# Altium PCB backplaneIGVC.PcbDoc
Units mm, origin at the board's own origin, x right, y up, seen from the top; angles counter-clockwise.
Board outline 105.5 x 102.5 mm, 2 copper layers (Top Layer, Bottom Layer); 21 components, 14 nets, 70 pads, 0 vias.
Unrouted connection lines stored in the file: 1.
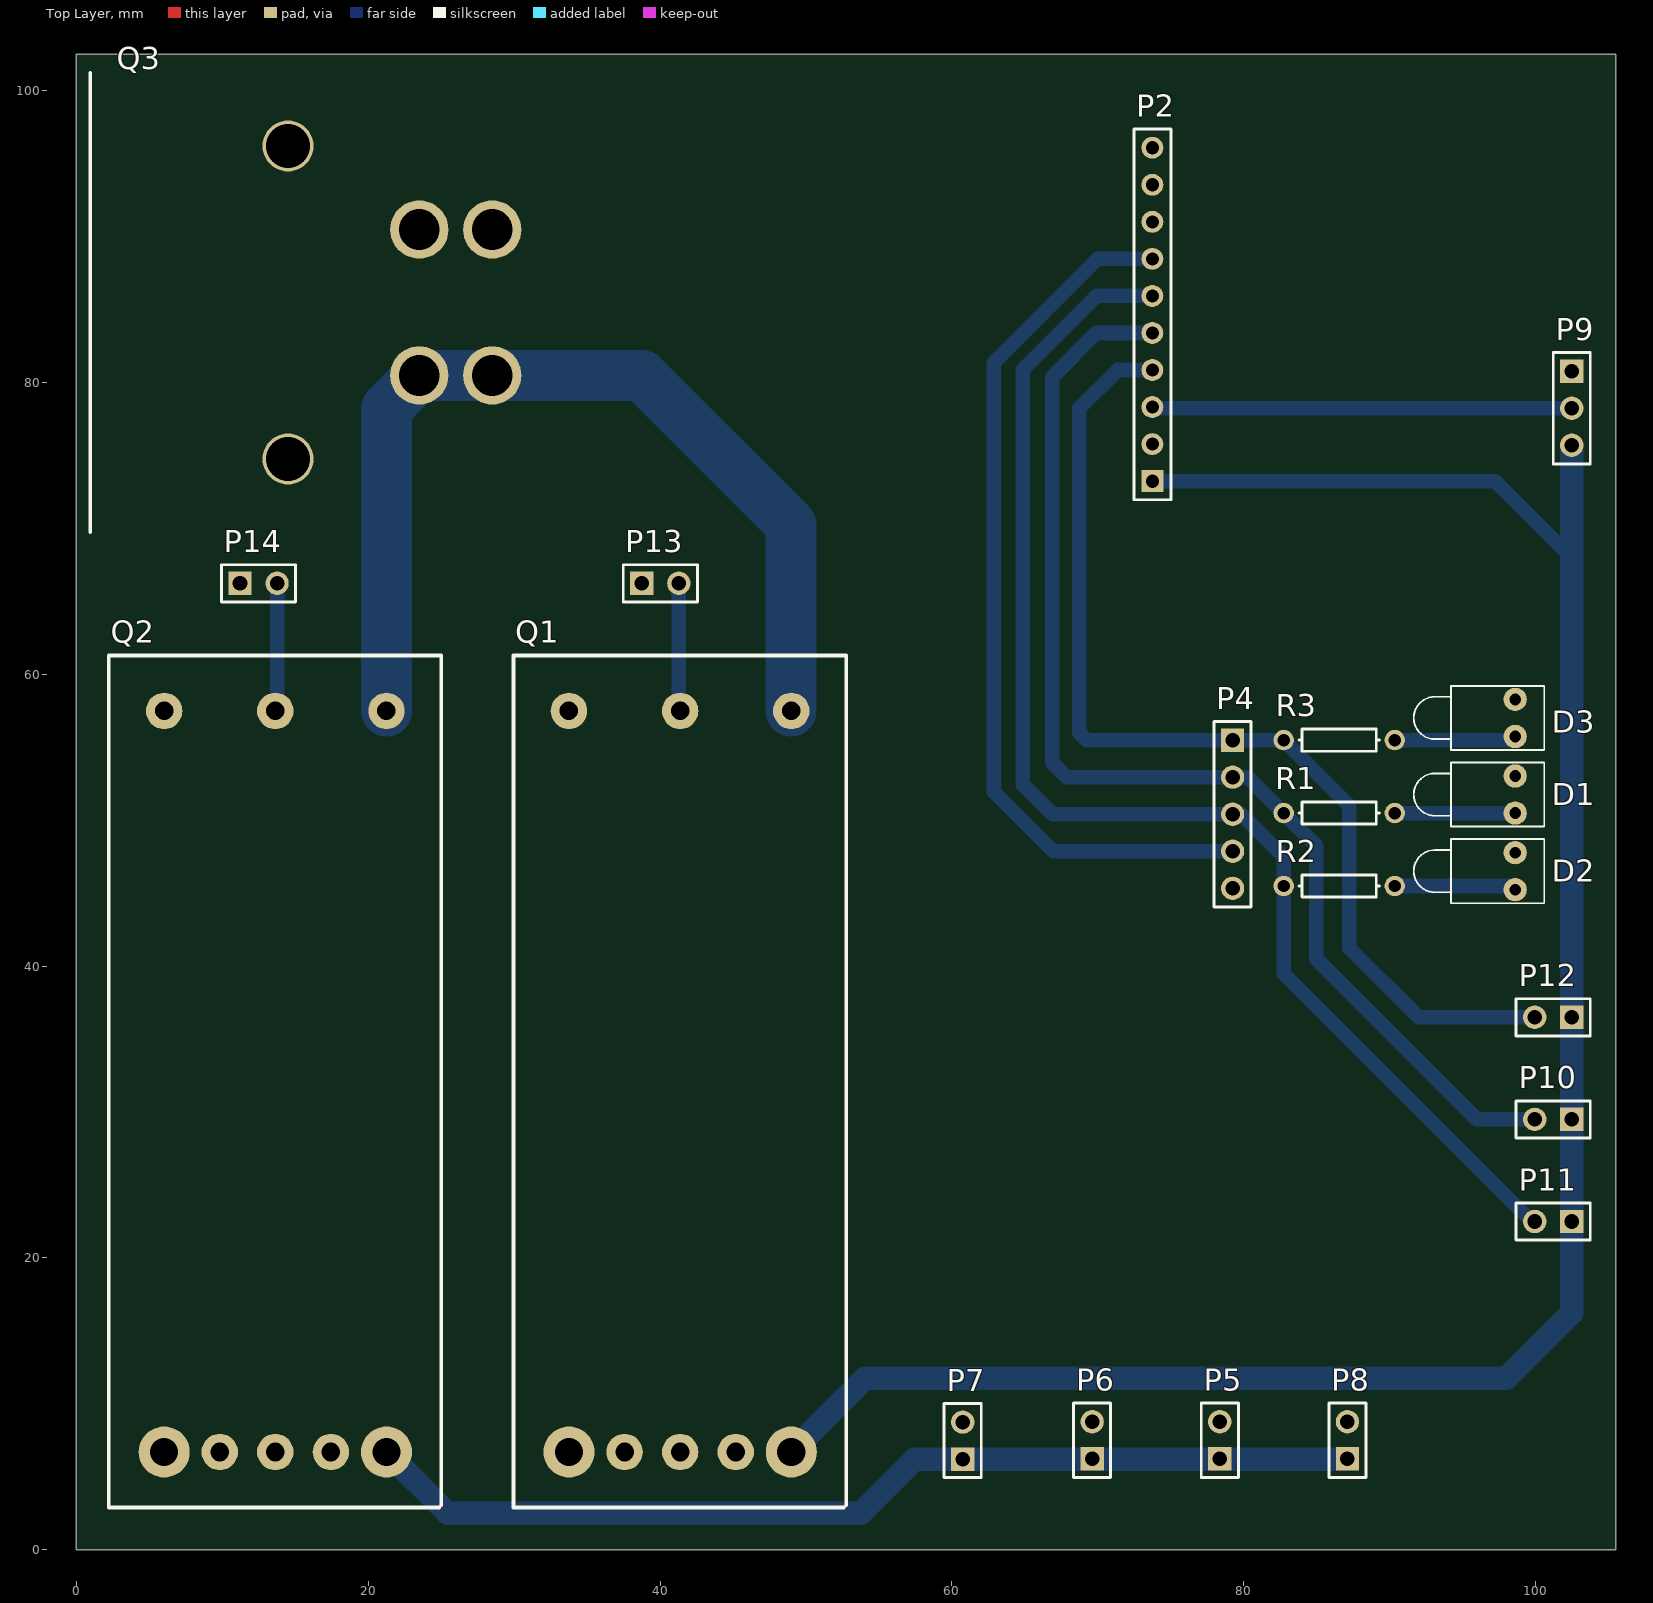
[diagram p0: Top Layer view]
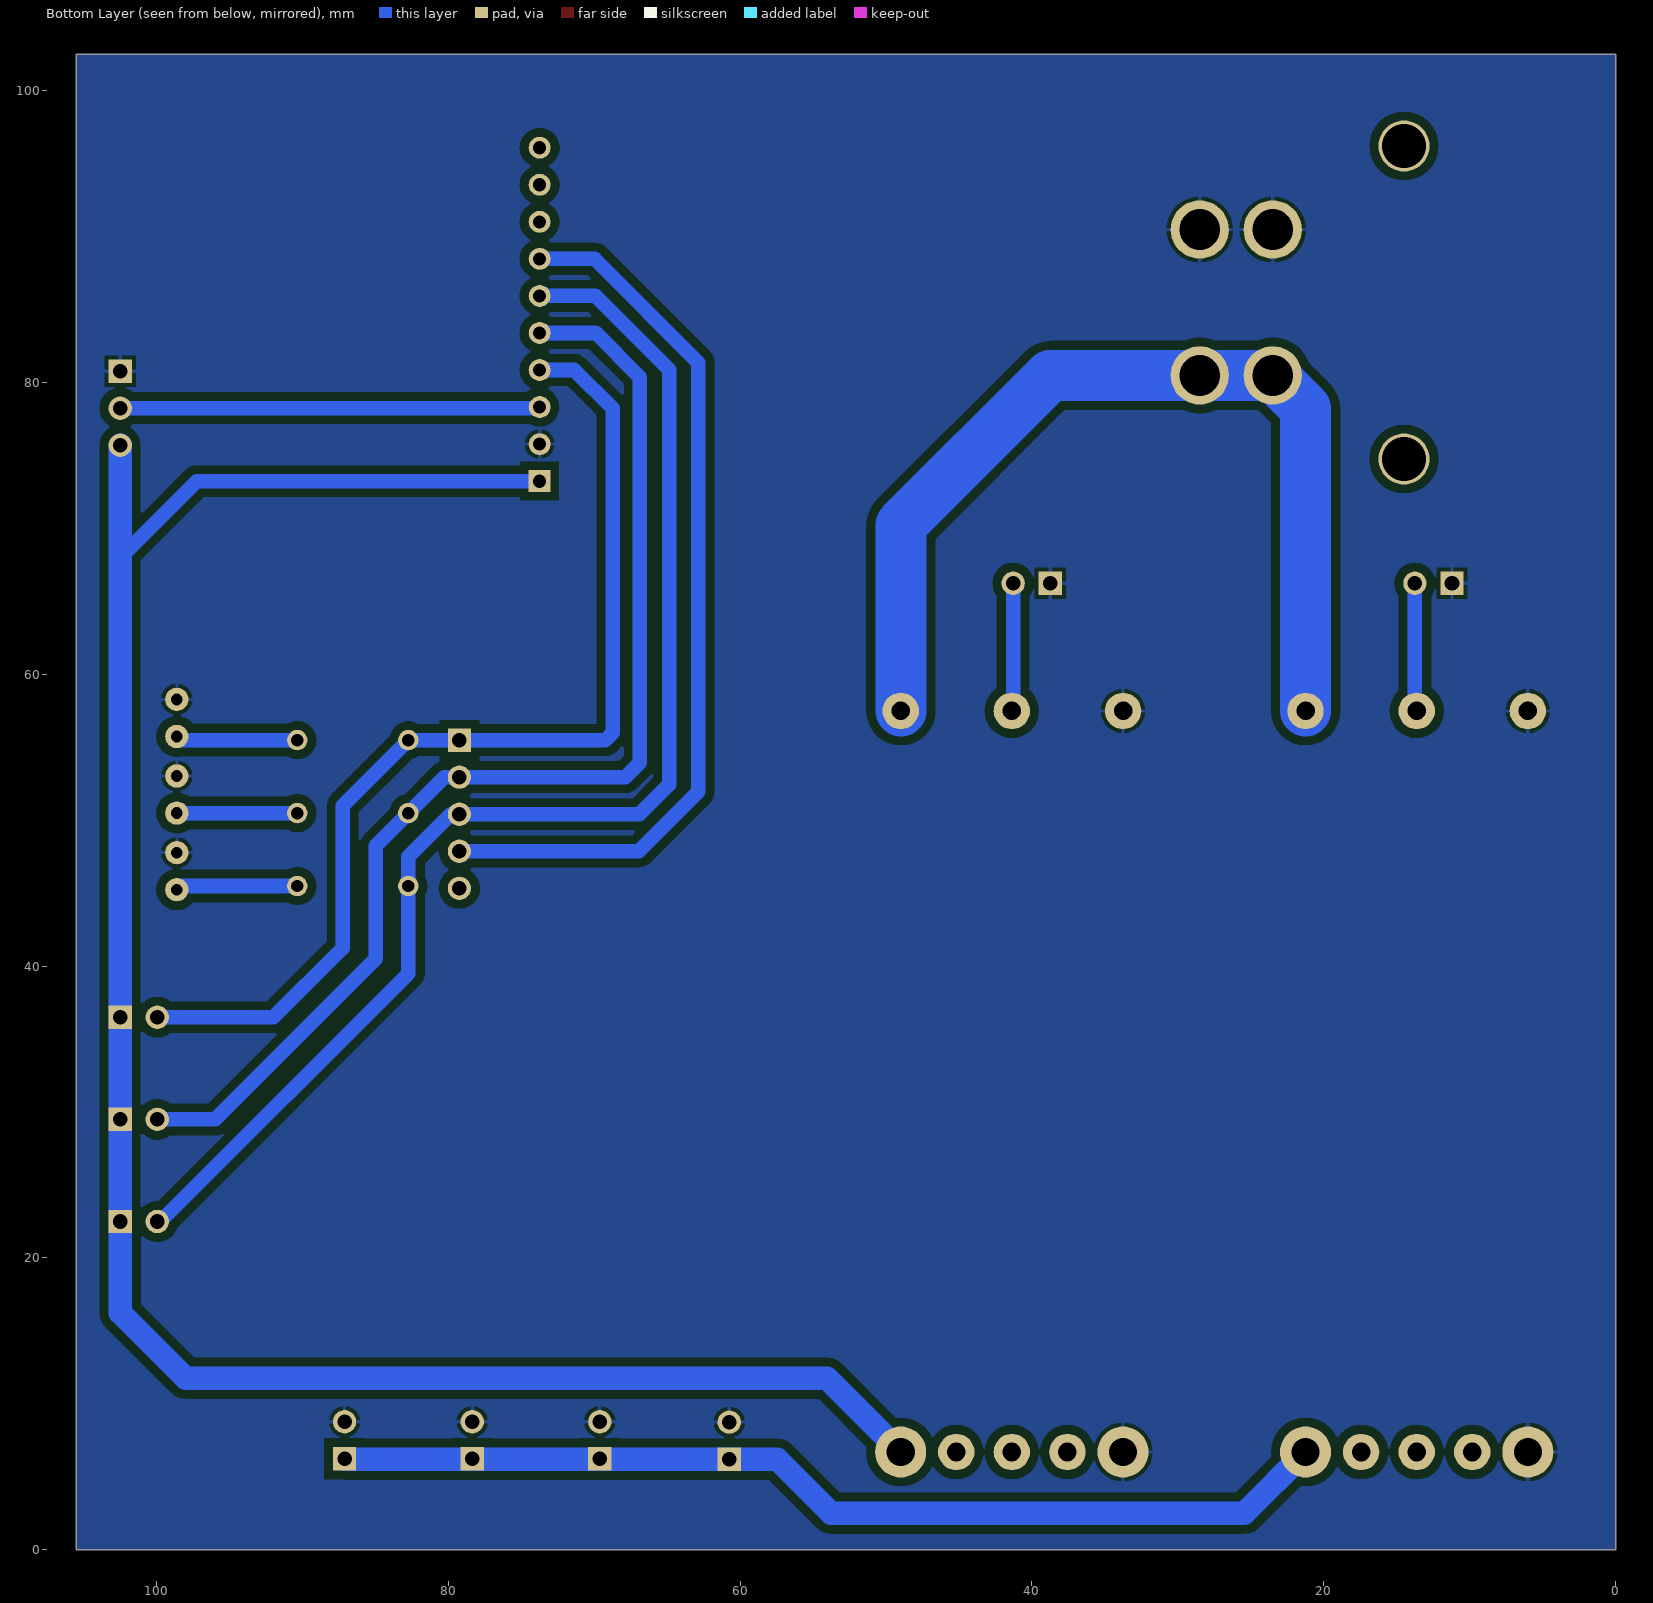
[diagram p1: Bottom Layer view, seen from below]

## Layer stack, top to bottom
Top Solder: solder mask 0.0102, Solder Resist, Dk 3.5
Top Layer: signal copper 0.0356
Dielectric 1: dielectric 0.32, FR-4, Dk 4.8
Bottom Layer: signal copper 0.0356
Bottom Solder: solder mask 0.0102, Solder Resist, Dk 3.5

## Board outline
0,0 105.5,0 105.5,102.5 0,102.5

## Design rules (kind name [scope] priority, off if disabled: settings)
Clearance [All] p1: gap=0.6
HoleToHoleClearance [All] p1: gap=0.1 allowstackedmicrovias=TRUE
MinimumSolderMaskSliver [All] p1: minsoldermaskwidth=0.1
PlaneClearance [All] p1: clearance=2
PolygonConnect [All] p1: connectstyle=Relief reliefconductorwidth=0.254 reliefentries=4 polygonreliefangle="90 Angle" airgapwidth=0.254
RoutingVias [All] p1: holewidth=0.711 width=1.27 viastyle="Through Hole" minholewidth=0.711 minwidth=1.27 maxholewidth=3 maxwidth=5
SilkToSilkClearance [All] p1: silktosilkclearance=0.1
SilkToSolderMaskClearance [IsPad] p1: minsilkscreentomaskgap=0.1 clearancetoexposedcopper=TRUE
SolderMaskExpansion [All] p1: expansion=0.1
Width RegWidth [All] p1: maxlimit=5 minlimit=0.1 preferedwidth=1 minimp=50.000000 maximp=50.000000 favimp=50.000000
Width ThickWidth [All] p2: maxlimit=5 minlimit=0.254 preferedwidth=2.5 minimp=50.000000 maximp=50.000000 favimp=50.000000
25 further rules are at their usual default settings.

## Components (designator, comment, footprint, x,y, rotation, side; value= is the part's Value field where it differs from the comment)
D1 "LED1" LED-1 98.62,51.77 r180 top
D2 "LED1" LED-1 98.62,46.52 r180 top
D3 "LED1" LED-1 98.62,57.02 r180 top
P2 "E-Stop" HDR1X10 73.75,73.25 r90 top
P4 "Blindmate" HDR1X5 79.25,55.5 r270 top
P5 "NUC Power" HDR1X2 78.375,6.235 r90 top
P6 "Camera Power" HDR1X2 69.625,6.235 r90 top
P7 "System Monitor" HDR1X2 60.75,6.21 r90 top
P8 "SICK" HDR1X2 87.125,6.235 r90 top
P9 "LEDStrip" HDR1X3 102.5,80.79 r270 top
P10 "RC Switch" HDR1X2 102.5,29.5 r180 top
P11 "Auto Switch" HDR1X2 102.5,22.5 r180 top
P12 "Safe Switch" HDR1X2 102.5,36.5 r180 top
P13 "5V Switch" HDR1X2 38.75,66.25 r0 top
P14 "12V Switch" HDR1X2 11.21,66.25 r0 top
Q1 "DC/DC" EHHD 29.96,57.5 r270 top
Q2 "DC/DC" EHHD 2.21,57.5 r270 top
Q3 "Power Conn" "Mini-Fit Power Conn" 14.5,96.23 r270 top
R1 "Res1" AXIAL-0.3 86.56,50.5 r0 top
R2 "Res1" AXIAL-0.3 86.56,45.5 r0 top
R3 "Res1" AXIAL-0.3 86.56,55.5 r0 top

## Footprints (in the part's own frame and the unit in brackets; to place one, negate y for a bottom-side part, rotate by r counter-clockwise, add the part's x,y. Pads: shape width x height; smd on the part's side, far side on the other; paste and mask are expansions set on the pad)
AXIAL-0.3 [mm] "Axial Device, Thru-Hole; 2 Leads; 0.3 in Pin Spacing"
  round 1.4 hole 0.85: 1(-3.81,0) 2(3.81,0)
  silkscreen extent -2.77,-0.76 2.77,0.76
EHHD [mm] "DC/DC"
  round 2.5 hole 1.27: 1(0,19.04) 2(0,11.42) 3(0,3.8) 5(50.8,7.61) 6(50.8,11.42) 7(50.8,15.23)
  round 3.5 hole 1.93: 4(50.8,3.8) 8(50.8,19.04)
  Top Layer lines w0.254: 54.6,22.64 54.44,22.8
  silkscreen extent -3.8,0 54.6,22.8
HDR1X2 [mm] "Connector; Header; 2 Position"
  rect 1.6x1.6 hole 1: 1(0,0)
  round 1.6 hole 1: 2(2.54,0)
  silkscreen extent -1.27,-1.27 3.81,1.27
HDR1X3 [mm] "Connector; Header; 3 Position"
  rect 1.6x1.6 hole 1: 1(0,0)
  round 1.6 hole 1: 2(2.54,0) 3(5.08,0)
  silkscreen extent -1.27,-1.27 6.35,1.27
HDR1X5 [mm] "Connector; Header; 5 Position"
  rect 1.6x1.6 hole 1: 1(0,0)
  round 1.6 hole 1: 2(2.54,0) 3(5.08,0) 4(7.62,0) 5(10.16,0)
  silkscreen extent -1.27,-1.27 11.43,1.27
HDR1X10 [mm] "Connector; Header; 10 Position"
  rect 1.5x1.5 hole 0.9: 1(0,0)
  round 1.5 hole 0.9: 2(2.54,0) 3(5.08,0) 4(7.62,0) 5(10.16,0) 6(12.7,0) 7(15.24,0) 8(17.78,0) 9(20.32,0) 10(22.86,0)
  silkscreen extent -1.27,-1.27 24.13,1.27
LED-1 [mm] "LED; 2 Leads"
  round 1.6 hole 0.8: 1(0,1.27) 2(0,-1.27)
  silkscreen extent -2,-2.2 6.95,2.2
"Mini-Fit Power Conn" [mm] "Molex Mini-Fit Power Connector"
  round 3.5 hole 3: 0(0,0) 0(21.46,0)
  round 4 hole 2.8: 1(5.73,14) 1(5.73,9) 2(15.73,9) 2(15.73,14)
  silkscreen extent -5,-13.56 26.46,-13.56

## Part data
D1 D2 D3: "Typical RED GaAs LED"
P2: library part "Header 10", "Header, 10-Pin"
P4: library part "Header 5", "Header, 5-Pin"
P5 P6 P7 P8 P10 P11 P12 P13 P14: library part "Header 2", "Header, 2-Pin"
P9: library part "Header 3", "Header, 3-Pin"
Q1 Q2: library part EHHD, "Voltage Regulator"
Q3: library part "Mini-Fit Power Conn", "Mini-Fit Molex Connector"
R1 R2 R3: "Resistor"

## Nets (pads, with @x,y where several pads share a name; then routed paths per layer and width w, separated by ;. In a path a pad name is that pad's centre, name@x,y a point inside that pad or via, vN(x,y) a via of type N, cw(c..) or ccw(c..) an arc to the next point about the centre after c; other vN are vias at no path point)
5V: P2.1 P9.3 P10.1 P11.1 P12.1 Q1.8 | length 147.8
  Bottom Layer w1: P2.1 97.25,73.25 102.5,68
  Bottom Layer w1.6: Q1.8 54.05,11.75 98,11.75 102.5,16.25 P10.1 P12.1 102.5,68 P9.3
12V: P5.1 P6.1 P7.1 P8.1 Q2.8 | length 69.2
  Bottom Layer w1.6: Q2.8 25.45,2.5 53.75,2.5 57.46,6.21 P7.1 65.75,6.21 70.75,6.21 P8.1@87.125,6.21
AUTO: P2.6 P4.3 P11.2 R2.1 | length 91.6
  Bottom Layer w1: P2.6 69.95,85.95 64.88,80.88 64.88,52.46 66.92,50.42 P4.3 79.83,50.42 82.75,47.5 R2.1 82.75,39.5 99.75,22.5 P11.2
ESTOP_ACTIVE: P2.7 P4.4 | length 61.3
  Bottom Layer w1: P2.7 69.99,88.49 62.88,81.38 62.88,51.96 66.96,47.88 P4.4
GND: D1.2 D2.2 D3.2 P2.2 P5.2 P6.2 P7.2 P8.2 P9.1 P13.1 P14.1 Q1.3 Q1.4 Q2.3 Q2.4 Q3.1
LEDSTRIP: P2.3 P9.2 | length 28.8
  Bottom Layer w1: P2.3 73.83,78.25 P9.2
NetD1_1: D1.1 R1.2 | length 8.2
  Bottom Layer w1: R1.2 D1.1
NetD2_1: D2.1 R2.2 | length 8.4
  Bottom Layer w1: R2.2 98.37,45.5 D2.1
NetD3_1: D3.1 R3.2 | length 8.4
  Bottom Layer w1: R3.2 98.37,55.5 D3.1
NetP13_2: P13.2 Q1.2 | length 8.8
  Bottom Layer w1: P13.2 41.29,57.59 Q1.2
NetP14_2: P14.2 Q2.2 | length 8.8
  Bottom Layer w1: Q2.2 13.75,57.62 P14.2
RC: P2.5 P4.2 P10.2 R1.1 | length 82.3
  Bottom Layer w1: P2.5 69.91,83.41 66.88,80.38 66.88,53.96 67.88,52.96 78.75,52.96 80.29,52.96 R1.1 85,48.25 85,40.5 96,29.5 P10.2
SAFE: P2.4 P4.1 P12.2 R3.1 | length 73.3
  Bottom Layer w1: P2.4 71.37,80.87 68.75,78.25 68.75,56 69.25,55.5 R3.1 87.25,51 87.25,41.25 92,36.5 P12.2
VBATT: Q1.1 Q2.1 Q3.2 | length 66.4
  Bottom Layer w3.5: Q2.1@21.24,57.5 21.24,78.24 23.5,80.5 28.5,80.5 38.75,80.5 48.99,70.26 Q1.1@48.99,57.5
pads on no net: P2.8 P2.9 P2.10 P4.5 Q1.5 Q1.6 Q1.7 Q2.5 Q2.6 Q2.7 Q3.0

## Polygon pours and split planes (outlines as drawn)
GND on Bottom Layer "Bottom Layer-GND" (solid, pour order 2): 105.5,0 105.5,102.5 0,102.5 0,0

## Silkscreen, mask and mechanical layers (free items; w line width, h text height)
Mechanical 1:
  the board outline again, w0.25